# Altium PCB PCB1.PcbDoc
Units mm, origin at the board's own origin, x right, y up, seen from the top; angles counter-clockwise.
Board outline 111.5 x 75 mm, 2 copper layers (Top Layer, Bottom Layer); 100 components, 59 nets, 353 pads, 33 vias.
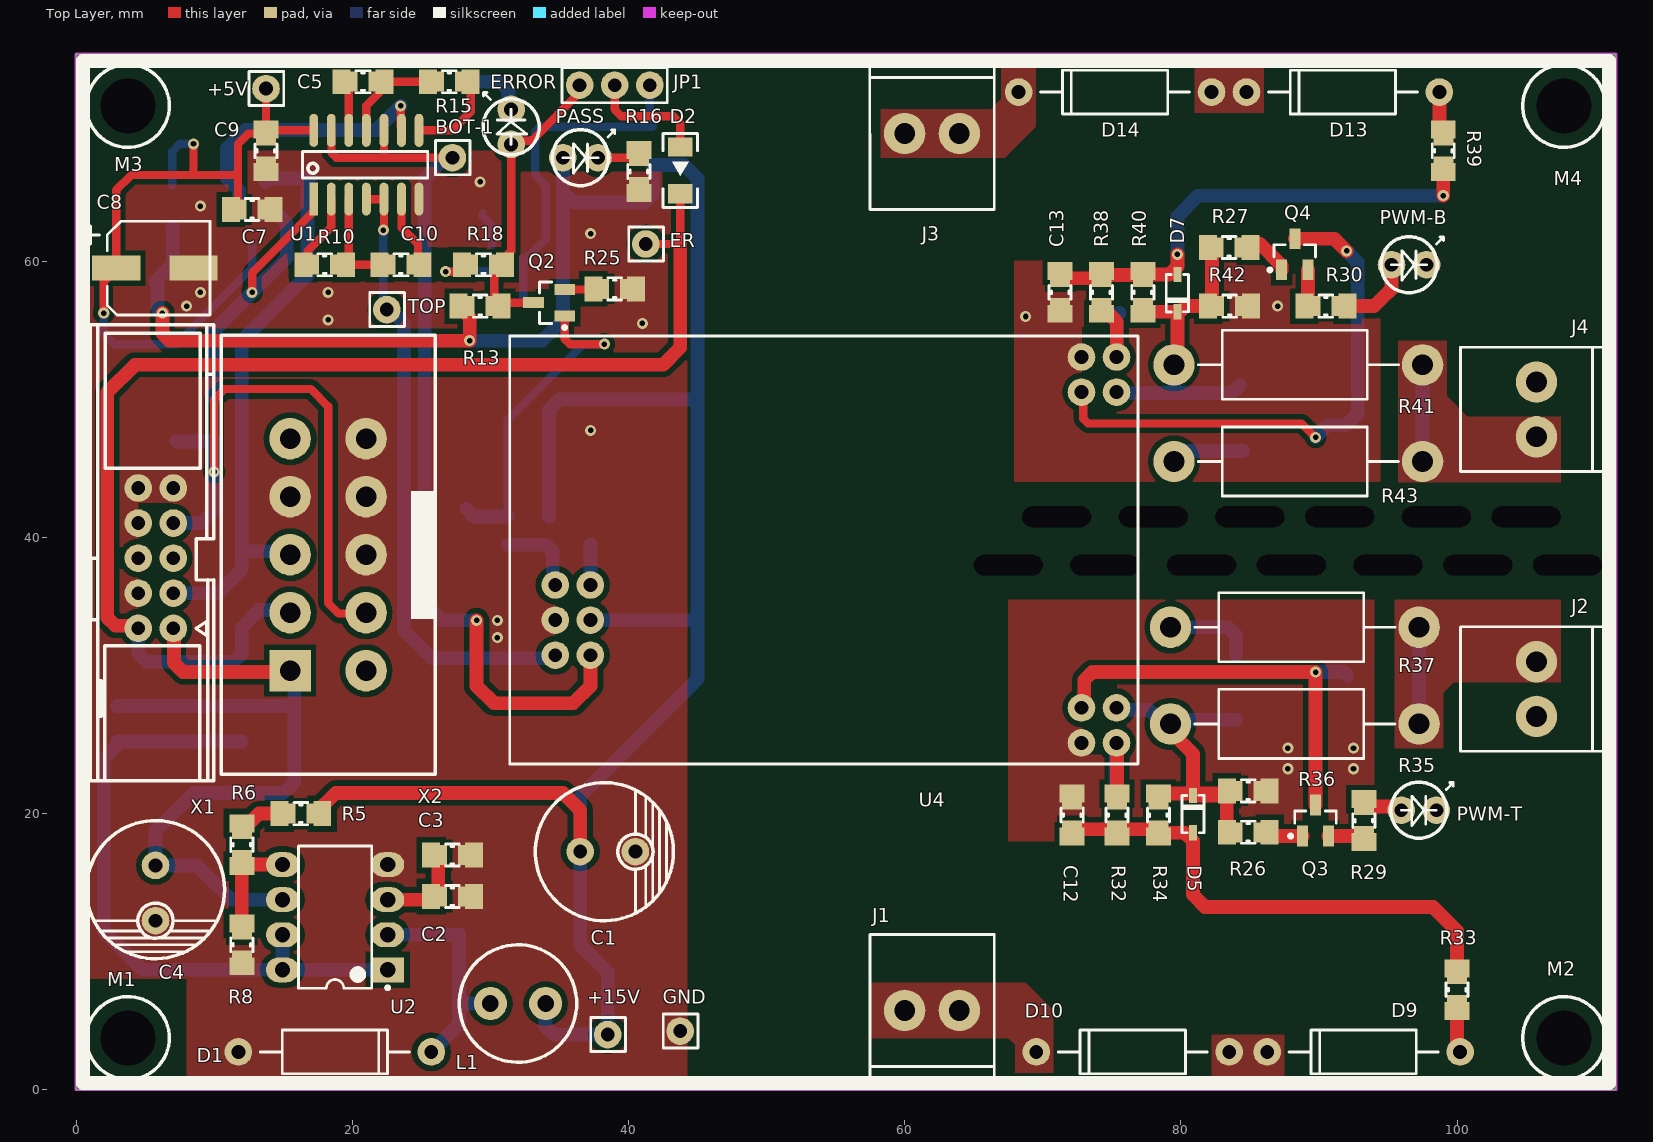
[diagram p0: Top Layer view]
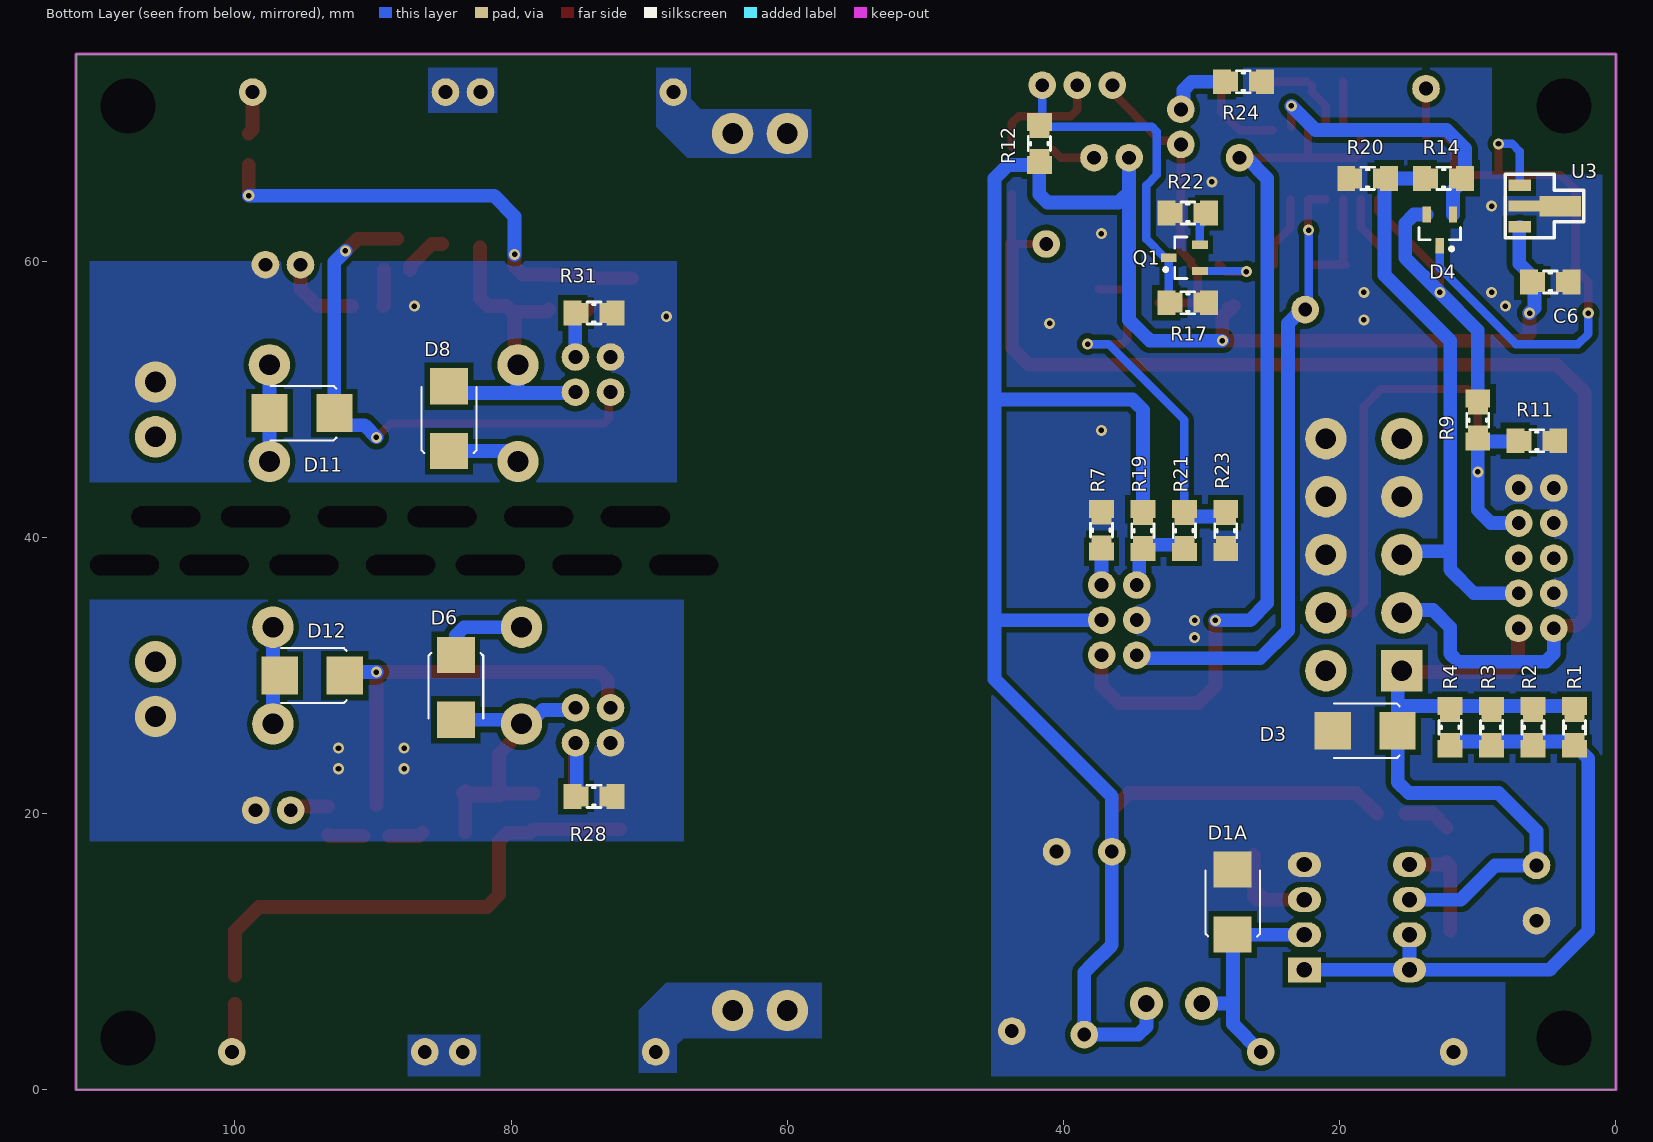
[diagram p1: Bottom Layer view, seen from below]

## Layer stack, top to bottom
Top Solder: solder mask 0.0102, Solder Resist, Dk 3.5
Top Layer: signal copper 0.0356
Dielectric 1: dielectric 0.32, FR-4, Dk 4.8
Bottom Layer: signal copper 0.0356
Bottom Solder: solder mask 0.0102, Solder Resist, Dk 3.5

## Board outline
0,0 111.5,0 111.5,75 0,75

## Design rules (kind name [scope] priority, off if disabled: settings)
Clearance [All] p1: gap=0.4 ignorepadtopadclearanceinfootprint=FALSE
PolygonConnect [All] p1: connectstyle=Direct reliefconductorwidth=0.254 reliefentries=4 polygonreliefangle="90 Angle" airgapwidth=0.254
RoutingVias [All] p1: holewidth=0.711 width=1.27 viastyle="Through Hole" minholewidth=0.711 minwidth=1.27 maxholewidth=0.711 maxwidth=1.27
SolderMaskExpansion [All] p1: expansion=0.102
Width [All] p1: maxlimit=2 minlimit=0.4 preferedwidth=0.4
30 further rules are at their usual default settings.

## Components (designator, comment, footprint, x,y, rotation, side; value= is the part's Value field where it differs from the comment)
+5V "Socket" tp 13.754,72.5 r180 top
+15V "Socket" tp 38.5,4 r180 top
BOT-1 "Socket" tp 27.254,67.5 r180 top
C1 "Cap Pol1" "10 mm Elco" 38.5,17.25 r0 top value=150uF/35V
C2 "Cap" RESC0805-1206 27.25,14 r180 top value=520pF
C3 "Cap" RESC0805-1206 27.25,17 r180 top value=520pF
C4 "Cap Pol1" "10 mm Elco" 5.75,14.25 r270 top value=150uF/35V
C5 "Cap" RESC0805-1206 20.775,73 r180 top value=380pF
C6 "Cap" RESC0805-1206 4.75,58.5 r0 bottom value=108nF
C7 "Cap" RESC0805-1206 12.75,63.75 r180 top value=108nF
C8 "Cap Pol1" "elco cap" 5.7,59.5 r0 top value=10uF/50V
C9 "Cap" RESC0805-1206 13.75,68 r270 top value=105nF
C10 "Cap" RESC0805-1206 23.525,59.75 r180 top value=2.9nF
C12 "Cap" RESC0805-1206 72.125,19.9 r90 top value=380pF
C13 "Cap" RESC0805-1206 71.25,57.75 r90 top value=380pF
D1 "Diode" Diode 25.72,2.75 r180 top value=Open
D1A "Diode" smb 27.75,11.25 r180 bottom value=SK210
D2 "Diode" "1206 diode" 43.75,66.5 r270 top value="Zener Diode"
D3 "Diode" smb 15.801,26 r90 bottom value=S2M
D4 "BAS40-05" SOT23_N 12.75,62.25 r270 bottom
D5 "Diode" "smd diode" 80.875,19.9 r270 top value=BAS316
D6 "Diode" smb 84,31.5 r0 bottom value=SK210
D7 "Diode" "smd diode" 79.75,57.75 r90 top value=BAS316
D8 "Diode" smb 84.5,46.25 r180 bottom value=SK210
D9 "Diode" Diode 86.25,2.75 r0 top value=UF4007
D10 "Diode" Diode 69.53,2.75 r0 top value=UF4007
D11 "Diode" smb 92.801,49 r90 bottom value=SK210
D12 "Diode" smb 92.051,30 r90 bottom value=SK210
D13 "Diode" Diode 84.75,72.25 r0 top value=UF4007
D14 "Diode" Diode 68.25,72.25 r0 top value=UF4007
ER "Socket" tp 41.254,61.25 r180 top
ERROR "LED0" led 31.5,68.46 r90 top value="3mm Led"
GND "Socket" tp 43.75,4.25 r180 top
J1 "Header 2" "2 pin con" 60,5.75 r90 top
J2 "Header 2" "2 pin con" 105.75,27.04 r180 top
J3 "Header 2" "2 pin con" 63.96,69.25 r270 top
J4 "Header 2" "2 pin con" 105.75,47.29 r180 top
JP1 "Header 3" "3 pin con" 39,72.75 r180 top
L1 "Inductor" INDUCTOR 32,6.25 r180 top value=10uH
M1 "Socket" "Mounting Hole" 3.75,3.75 r180 top locked
M2 "Socket" "Mounting Hole" 107.75,3.75 r180 top locked
M3 "Socket" "Mounting Hole" 3.75,71.25 r180 top locked
M4 "Socket" "Mounting Hole" 107.75,71.25 r180 top locked
PASS "LED0" led 35.25,67.5 r0 top value="3mm Led"
PWM-B "LED0" led 95.25,59.75 r0 top value="3mm Led"
PWM-T "LED0" led 95.96,20.25 r0 top value="3mm Led"
Q1 "2N2222A" SOT23_N 31.25,60.25 r0 bottom
Q2 "2N2222" SOT-23_N 34.25,57 r180 top
Q3 "2N2222B" SOT-23_N 89.75,19.5 r90 top
Q4 "2N2222B" SOT-23_N 88.25,60.5 r90 top
R1 "Res3" RESC0805-1206 3,26.25 r270 bottom value=1E
R2 "Res3" RESC0805-1206 6,26.25 r270 bottom value=1E
R3 "Res3" RESC0805-1206 9,26.25 r270 bottom value=1E
R4 "Res3" RESC0805-1206 12,26.25 r270 bottom value=1E
R5 "Res3" RESC0805-1206 16.275,20 r180 top value=10K
R6 "Res3" RESC0805-1206 12,17.75 r90 top value=1K
R7 "Res3" RESC0805-1206 37.25,40.525 r270 bottom value=100K
R8 "Res3" RESC0805-1206 12,10.5 r90 top value=1K
R9 "Res3" RESC0805-1206 10,48.5 r270 bottom value=3.3K
R10 "Res3" RESC0805-1206 18,59.75 r180 top value=5.6K
R11 "Res3" RESC0805-1206 5.725,47 r0 bottom value=4.7K
R12 "Res3" RESC0805-1206 41.75,68.525 r270 bottom value=4.7K
R13 "Res3" RESC0805-1206 29.25,56.75 r180 top value=3.3K
R14 "Res3" RESC0805-1206 12.475,66 r0 bottom value=3.3K
R15 "Res3" RESC0805-1206 27.025,73 r180 top value=5.6K
R16 "Res3" RESC0805-1206 40.75,66.5 r270 top value=4.7K
R17 "Res3" RESC0805-1206 31,57 r0 bottom value=1K
R18 "Res3" RESC0805-1206 29.5,59.75 r180 top value=Open
R19 "Res3" RESC0805-1206 34.25,40.5 r270 bottom value=15K
R20 "Res3" RESC0805-1206 17.975,66 r0 bottom value=4.7K
R21 "Res3" RESC0805-1206 31.25,40.5 r270 bottom value=33K
R22 "Res3" RESC0805-1206 31,63.5 r0 bottom value=0E
R23 "Res3" RESC0805-1206 28.25,40.5 r270 bottom value=3.3K
R24 "Res3" RESC0805-1206 26.975,73 r0 bottom value=10K
R25 "Res3" RESC0805-1206 39,58 r180 top value=0E
R26 "Res3" RESC0805-1206 84.875,18.65 r180 top value=10K
R27 "Res3" RESC0805-1206 83.5,61 r180 top value=10K
R28 "Res3" RESC0805-1206 74,21.25 r0 bottom value=Open
R29 "Res3" RESC0805-1206 93.25,19.5 r90 top value=4.7K
R30 "Res3" RESC0805-1206 90.5,56.75 r180 top value=4.7K
R31 "Res3" RESC0805-1206 74,56.25 r0 bottom value=Open
R32 "Res3" RESC0805-1206 75.375,19.9 r90 top value=15K
R33 "Res3" RESC0805-1206 100,7.25 r90 top value=330E
R34 "Res3" RESC0805-1206 78.375,19.9 r90 top value=18K
R35 "Res3" "2W Res" 79.25,26.5 r0 top value=10E
R36 "Res3" RESC0805-1206 84.875,21.65 r180 top value=22K
R37 "Res3" "2W Res" 79.25,33.5 r0 top value=4.7E
R38 "Res3" RESC0805-1206 74.25,57.75 r90 top value=15K
R39 "Res3" RESC0805-1206 99,68 r90 top value=330E
R40 "Res3" RESC0805-1206 77.25,57.75 r90 top value=18K
R41 "Res3" "2W Res" 79.5,52.5 r0 top value=10E
R42 "Res3" RESC0805-1206 83.525,56.75 r180 top value=22K
R43 "Res3" "2W Res" 79.5,45.5 r0 top value=4.7E
TOP "Socket" tp 22.5,56.5 r180 top
U1 "CD40106" sop14 17.21,64.5 r90 top value=40106
U2 "MC34063AL" DIP-8 18.75,12.5 r180 top
U3 "LM7805" sot-23-3 5.5,64 r270 bottom
U4 "2SC0106T" "14 pin ic" 54.25,38.75 r0 top
X1 "Header 5X2A" "10 pin con" 7.04,33.42 r0 top
X2 "Header 5X2A" "X2 CON" 15.5,30.35 r0 top

## Footprints (in the part's own frame and the unit in brackets; to place one, negate y for a bottom-side part, rotate by r counter-clockwise, add the part's x,y. Pads: shape width x height; smd on the part's side, far side on the other; paste and mask are expansions set on the pad)
"2 pin con" [mm]
  round 3 hole 1.5 unplated: 1(0,0) 2(0,-3.96)
  silkscreen extent -5.5,-6.49 5.51,2.52
"2W Res" [mm]
  round 3 hole 1.5: 1(0,0) 2(18,0)
  silkscreen extent 1.75,-2.5 16.25,2.5
"3 pin con" [mm]
  round 2 hole 1 unplated: 1(-2.54,0) 2(0,0) 3(2.54,0)
  silkscreen extent -3.94,-1.4 3.81,1.27
"10 mm Elco" [mm]
  round 2 hole 1: 1(-2,0) 2(2,0)
  silkscreen extent -5.25,-5 4.75,5
"10 pin con" [mm]
  round 2 hole 1 unplated: 1(0,0) 2(0,2.54) 3(0,5.08) 4(0,7.62) 5(0,10.16) 6(-2.54,10.16) 7(-2.54,7.62) 8(-2.54,5.08) 9(-2.54,2.54) 10(-2.54,0)
  silkscreen extent -6,-11.05 2.92,22
"14 pin ic" [mm]
  round 2 hole 1: 1(-17.01,-2.196) 2(-19.55,-2.196) 3(-17.01,-4.736) 4(-19.55,-4.736) 5(-17.01,-7.276) 6(-19.55,-7.276) 7(18.55,-13.626) 8(21.09,-13.626) 9(18.55,-11.086) 10(21.09,-11.086) 11(18.55,11.774) 12(21.09,11.774) 13(18.55,14.314) 14(21.09,14.314)
  silkscreen extent -22.85,-15.16 22.65,15.84
"1206 diode" [mm]
  rect 1.4x1.8 smd paste+0 mask+0.102: 1(-1.778,0) 2(1.622,0)
  silkscreen extent -2.75,-1.25 2.6,1.25
Diode [mm]
  round 2 hole 1 unplated: 1(0,0) 2(13.97,0)
  silkscreen extent 1.59,-1.59 12.38,1.59
DIP-8 [mm] "DIP; 8 Leads; Row Spacing 7.62 mm; Pitch 2.54 mm"
  rect 2.4x1.8 hole 1.1: 1(-3.81,3.81)
  oval 2.4x1.8 hole 1.1: 2(-3.81,1.27) 3(-3.81,-1.27) 4(-3.81,-3.81) 5(3.81,-3.81) 6(3.81,-1.27) 7(3.81,1.27) 8(3.81,3.81)
  silkscreen extent -3.94,-5.15 2.65,5.23, body extent -3.6,-5.15 3.6,5.15, height 5.08
"elco cap" [mm]
  rect 3.5x1.8 smd: 1(-2.8,0) 2(2.8,0)
  silkscreen extent -5.32,-3.4 4,3.4
INDUCTOR [mm]
  round 2.4 hole 1.2: 1(-2,0) 2(2,0)
  silkscreen extent -4.25,-4.25 4.25,4.25
led [mm]
  round 2 hole 1 unplated: 1(0,0) 2(2.54,0)
  silkscreen extent -0.76,-2.03 3.76,2.03
"Mounting Hole" [mm]
  round 2 hole 4 unplated: 1(0,0)
  silkscreen extent -3,-3 3,3
RESC0805-1206 [mm]
  rect 1.3x1.8 smd: 1(-1.55,0) 2(1.55,0)
  rect 1.25x1.45 smd: 1(-1.025,0) 2(1.025,0)
  silkscreen extent -0.5,-0.8 0.5,0.8, body extent -1.63,-0.82 1.63,0.82, height 0.7
smb [mil]
  rect 107.99x102.99 smd: 1(0,0) 2(0,185)
  silkscreen extent -78,-6 78,182
"smd diode" [mm]
  rect 1.1x0.599 smd: 1(-1.409,0) 2(1.291,0)
  silkscreen extent -1.43,-0.8 1.29,0.8
sop14 [mm]
  rect 2.388x0.635 smd paste+0: 1(0,0)
  oval 2.388x0.635 smd paste+0: 2(0,-1.27) 3(0,-2.54) 4(0,-3.81) 5(0,-5.08) 6(0,-6.35) 7(0,-7.62) 8(4.978,-7.62) 9(4.978,-6.35) 10(4.978,-5.08) 11(4.978,-3.81) 12(4.978,-2.54) 13(4.978,-1.27) 14(4.978,0)
  silkscreen extent 1.54,-8.25 3.44,0.82
SOT23_N [mm] "SOT23, 3-Leads, Body 2.9x1.3mm, Pitch 0.95mm, Lead Span 2.3mm - Reverse Pinning, IPC Medium Density"
  rect 1.15x0.6 smd: 1(1.125,0) 2(-1.125,-0.95) 3(-1.125,0.95)
  silkscreen extent -0.2,-1.5 1.47,1.5, body extent -0.7,-1.5 0.7,1.5, height 1.1
sot-23-3 [mm]
  rect 0.813x1.626 smd paste+0 mask+0.101: 1(-1.499,-1.464) 3(1.499,-1.464)
  rect 0.813x2.388 smd paste+0 mask+0.101: 2(0,-1.083)
  rect 1.5x3 smd: 2(0.025,1.464)
  silkscreen extent -2.29,-2.5 2.29,3.18
SOT-23_N [mm] "SOT23, 3-Leads, Body 2.9x1.3mm, Pitch 0.95mm, Lead Span 2.5mm, IPC Medium Density"
  rect 1.5x0.8 smd: 1(-1.125,0.95) 2(-1.125,-0.95) 3(1.125,0)
  silkscreen extent -1.25,-1.5 0.7,1.92, body extent -0.7,-1.5 0.7,1.5, height 1.1
tp [mm]
  round 2 hole 1 unplated: 1(0.004,0)
  silkscreen extent -1.28,-1.24 1.23,1.23
"X2 CON" [mm]
  rect 3x3 hole 1.5: 1(0,0)
  round 3 hole 1.5: 2(0,4.2) 3(0,8.4) 4(0,12.6) 5(0,16.8) 6(5.5,16.8) 7(5.5,12.6) 8(5.5,8.4) 9(5.5,4.2) 10(5.5,0)
  silkscreen extent -5,-7.5 10.5,24.3

## Part data
C1 C4 C8: "Polarized Capacitor (Radial)", LatestRevisionDate=17-Jul-2002, LatestRevisionNote="Re-released for DXP Platform.", PackageDescription="Polarized Capacitor (Radial); 2 Leads", PackageReference=RB7.6-15, Published=8-Jun-2000, Publisher="Altium Limited"
C2 C3 C5 C6 C7 C9 C10 C12 C13: "Capacitor", LatestRevisionDate=17-Jul-2002, LatestRevisionNote="Re-released for DXP Platform.", PackageDescription="Radial Cap, Thru-Hole; 2 Leads; 0.3 in Pin Spacing", PackageReference=RAD-0.3, Published=8-Jun-2000, Publisher="Altium Limited"
D2: "Default Diode", Code_JEDEC=DO-214-AB, LatestRevisionDate=17-Jul-2002, LatestRevisionNote="Re-released for DXP Platform.", PackageDescription="DO-214-AB/SMC; 2 C-Bend Leads; Body 7.9 x 5.9 mm, inc. leads (LxW)", PackageReference=SMC, PackageVersion=Sep-1996, Published=8-Jun-2000, Publisher="Altium Limited"
ERROR PASS PWM-B PWM-T: "Typical INFRARED GaAs LED", LatestRevisionDate=08-Jul-2005, LatestRevisionNote="Mech Layer 1 removed.", PackageDescription="LED; 2 Leads", PackageReference=LED-0, Published=8-Jun-2000, Publisher="Altium Limited"
J1 J2 J3 J4: "Header, 2-Pin", LatestRevisionDate=17-Jul-2002, LatestRevisionNote="Re-released for DXP Platform.", Publisher="Altium Limited"
JP1: "Header, 3-Pin", LatestRevisionDate=17-Jul-2002, LatestRevisionNote="Re-released for DXP Platform.", Publisher="Altium Limited"
R1 R2 R3 R4 R5 R6 R7 R8 R9 R10 R11 R12 R13 R14 R15 R16 R17 R18 R19 R20 R21 R22 R23 R24 R25 R26 R27 R28 R29 R30 R31 R32 R33 R34 R35 R36 R37 R38 R39 R40 R41 R42 R43: "Resistor", LatestRevisionDate=29-May-2009, LatestRevisionNote="IPC-7351 Footprint Added.", PackageDescription="Chip Resistor", PackageReference=J1-0603, Published=8-Jun-2000, Publisher="Altium Limited"
X1 X2: "Header, 5-Pin, Dual row", LatestRevisionDate=17-Jul-2002, LatestRevisionNote="Re-released for DXP Platform.", Publisher="Altium Limited"
+5V +15V BOT-1 ER GND M1 M2 M3 M4 TOP: LatestRevisionDate=17-Jul-2002, LatestRevisionNote="Re-released for DXP Platform.", Publisher="Altium Limited"
L1: Code_IEC=1005, Code_JEITA=0402, LatestRevisionDate=29-May-2009, LatestRevisionNote="IPC-7351 Footprint Added.", PackageDescription="Chip Inductor", PackageReference=0402-A, Published=8-Jun-2000, Publisher="Altium Limited"

## Free pads (board coordinates)
  round 0 hole 1.5 slot 5 at 0 deg unplated: 2(67.5,38) 3(71,41.5) 4(74.5,38) 5(78,41.5) 6(81.5,38) 6(95,38) 7(85,41.5) 7(98.5,41.5) 8(88,38) 8(101.5,38) 8(108,38) 9(91.5,41.5) 9(105,41.5)

## Via types
v1: diameter 0.8, hole 0.4, Top Layer to Bottom Layer, 33 vias

## Nets (pads, with @x,y where several pads share a name; then routed paths per layer and width w, separated by ;. In a path a pad name is that pad's centre, name@x,y a point inside that pad or via, vN(x,y) a via of type N, cw(c..) or ccw(c..) an arc to the next point about the centre after c; other vN are vias at no path point)
+5V: +5V.1 C7.2 C8.1 C9.1 D4.1 U1.14 U3.1 | length 55.6
  Top Layer w0.6: v1(2,56.25) 2,58.5 C8.1@3,59.5 ; C8.1 2.9,65.149 4.001,66.25 11.587,66.25 11.725,66.112 ; 8.5,66.25 v1(8.5,68.5) ; C7.2@11.725,63.75 11.725,66.112 ; C9.1@13.75,69.025 C9.1@13.75,69.25 ; +5V.1 C9.1@13.75,69.55 ; U1.14 13.822,69.478 C9.1@13.75,69.55 ; 11.725,66.112 11.725,68.475 12.5,69.25 C9.1@13.75,69.25 ; C9.1@13.75,69.25 C9.1@13.75,69.55
  Bottom Layer w0.6: v1(2,56.25) 2,54.75 2.75,54 7.25,54 12.75,59.5 D4.1 ; U3.1 6.964,67.964 7.5,68.5 v1(8.5,68.5)
+15V: +15V.1 C1.1 C6.2 L1.1 PASS.1 R5.1 R12.2 R13.2 R19.1 U3.3 U4.3 | length 195.4
  Top Layer w0.6: R13.2@28.125,56.65 R13.2@28.225,56.75
  Top Layer w1: v1(6.25,56.25) 6.25,54.75 6.75,54.25 v1(28.5,54.25) 28.5,55.95 R13.2@27.7,56.75 ; R5.1@17.3,20 18.8,21.5 35.25,21.5 36.5,20.25 C1.1
  Bottom Layer w1: v1(6.25,56.25) 5.9,56.6 5.9,58.375 5.775,58.5 5.775,58.6 7,59.825 7,60.75 7,62.465 U3.3 ; v1(28.5,54.25) 33.75,54.25 34.25,54.75 35.25,55.75 35.25,65.75 ; L1.1 34,4.586 34.586,4 +15V.1 38.496,8.504 38,9 36.5,10.5 C1.1@36.5,17 ; R19.1@34.25,41.525 34.25,49.25 34.75,49.75 35,50 45,50 ; PASS.1@35.25,67.25 35.25,65 35.75,64.5 36,64.25 40.75,64.25 41.164,64.25 41.75,64.836 41.75,66.975 44.025,66.975 44.5,66.5 45,66 45,64.75 45,39.25 ; C1.1 36.5,21.25 40.5,25.25 ; 37.25,22 45,29.75 45,41.25 ; U4.3@37.25,33.96 37.29,34 45,34
ERROR: D2.2 ER.1 X1.10 X2.2 | length 91.2
  Top Layer w0.6: ER.1 43.75,61.25 D2.2
  Top Layer w1: X1.10 4.309,33.611 2.836,33.611 2.25,34.197 2.25,50.5 4.25,52.5 42.5,52.5 43.75,53.75 43.75,61.25
  Bottom Layer w1: X1.10 4.5,31.586 5.086,31 11.414,31 12,31.586 12,33.5 13.25,34.75 15.3,34.75 X2.2
ERROR1: ERROR.1 JP1.3 Q2.3 R13.1 R18.1 | length 21.4
  Top Layer w0.6: R13.1@30.275,56.75 30.275,59.275 R18.1@30.75,59.75 ; R13.1@30.75,57 Q2.3 ; R18.1@30.75,60 31.5,60.75 ERROR.1 31.768,68.728 32.978,68.728 33.25,69 36.46,72.21 JP1.3
ERROR2: JP1.1 Q1.1 R12.1 R17.2 | length 25
  Bottom Layer w0.6: R17.2@32.55,57 32.375,57.175 Q1.1 32.65,60.25 34,61.6 34,65.5 33.25,66.25 33.25,69.399 33.601,69.75 R12.1@41.75,69.75 ; JP1.1 41.54,70.285 R12.1@41.75,70.075
G1: D5.1 D6.2 R26.2 R34.2 R35.1 R36.2 U4.10 | length 25.9
  Top Layer w1: R34.2@78.375,21.45 83.45,21.45 83.5,21.5 83.31,21.31 D5.1 80.875,24.334 80.5,24.709 79.25,25.959 R35.1 ; R26.2@83.325,18.65 R36.2@83.325,21.65
  Bottom Layer w1: U4.10@75.35,27.61 75.46,27.5 77.25,27.5 77.709,27.5 78.709,26.5 R35.1 79.551,26.801 D6.2
G2: D7.1 D8.2 R27.2 R40.1 R41.1 R42.2 U4.12 | length 24.1
  Top Layer w1: R40.1@77.25,56.5 77.409,56.34 D7.1 ; R41.1 79.75,52.75 79.75,56.164 80.336,56.75 81.664,56.75 82.132,57.218 82.25,57.336 R27.2@82.25,61
  Bottom Layer w1: U4.12@75.35,50.47 83.72,50.47 D8.2@84.25,51 ; R41.1 79.535,52.465 79.535,50.47
GND: C1.2 C2.1 C3.1 C4.2 C6.1 C7.1 C8.2 C9.2 D1.2 D1A.2 D3.2 GND.1 R7.1 R8.1 R11.1 R16.2 R17.1 R20.2 R22.2 R23.2 R24.1 R25.1 U1.7 U2.4 U3.2 U4.4 X1.5 X1.6 X1.7 X1.9 X2.4 X2.6 X2.7 X2.8 | length 0.4
  Top Layer w1: U4.4@34.67,34 U4.4@34.71,33.96
  Bottom Layer w1: X2.4 X2.4@15.7,42.75 ; U4.4@34.67,34 U4.4@34.71,33.96
  other v1: 30.5,32.75 30.5,34 37.25,47.75 41,55.5 18.25,55.75 8,56.75 9,57.75 18.25,57.75 37.25,62 9,64 29.25,65.75
"I/P A": D4.2 R9.1 U1.1 | length 25.3
  Top Layer w0.6: v1(12.75,57.75) 12.75,59 12.75,59.164 17.21,63.624 U1.1
  Bottom Layer w1: R9.1@10,50.05 10,52.75 10,54.25 10,55 v1(12.75,57.75) 15.25,60.25 15.25,61.25 15.25,62.75 14.75,63.25 14.625,63.375 D4.2
"I/P D": D4.3 R14.1 U1.9 | length 22.5
  Top Layer w0.6: U1.9@23.5,69.75 v1(23.5,71.25)
  Bottom Layer w1: D4.3 11.8,65.125 10.925,66 10.925,68.175 11.25,68.5 12.25,69.5 14.5,69.5 20.5,69.5 ; 18.5,69.5 21.75,69.5 v1(23.5,71.25)
NetC2_2: C2.2 C3.2 U2.3 | length 7
  Top Layer w1: U2.3 25.995,13.77 C2.2@26.225,14 ; C2.2@25.7,14 26.225,14.525 C3.2@26.225,17
NetC5_1: C5.1 R15.2 U1.11 | length 6.8
  Top Layer w0.6: U1.11 21.02,71.27 21.5,71.75 22,72.25 C5.1@22,72.75 ; C5.1@22.325,73 R15.2@25.475,73
NetC5_2: C5.2 U1.12 | length 3.5
  Top Layer w0.6: U1.12 C5.2@19.75,73
NetC10_1: C10.1 U1.6 | length 5.2
  Top Layer w0.6: U1.6 23.56,62.44 23.75,62.25 24.75,61.25 C10.1@24.75,59.75
NetC10_2: C10.2 R10.1 U1.3 | length 7.2
  Top Layer w0.6: R10.1@19.55,59.75 C10.2@21.975,59.75 ; R10.1@19.75,59.75 U1.3
NetC12_1: C12.1 D5.2 R32.1 R33.2 R34.1 | length 36.4
  Top Layer w1: C12.1@72.125,18.875 75.375,18.875 78.375,18.875 78.641,18.61 80.289,18.61 80.875,18.024 80.875,14.125 81.75,13.25 98.25,13.25 98.5,13 100,11.5 100,8.8 R33.2@100,8.275
NetC13_2: C13.2 D7.2 R38.2 R39.1 R40.2 | length 42.6
  Top Layer w1: C13.2@71.25,58.775 74.025,58.775 74.25,59 77.25,59 77.291,59.04 79.164,59.04 79.457,59.333 79.75,59.626 v1(79.75,60.5) ; v1(99,64.75) R39.1@99,66.975
  Bottom Layer w1: v1(79.75,60.5) 79.75,62 79.75,63.25 81.25,64.75 95,64.75 ; 95,64.75 v1(99,64.75) ; 95,64.75 v1(99,64.75) ; 95,64.75 v1(99,64.75)
NetD1_1: D1.1 D1A.1 L1.2 U2.2 | length 16.8
  Bottom Layer w1: U2.2 D1A.1@27.73,11.23 ; D1.1 27.73,4.76 D1A.1@27.73,11.23 ; 27.75,6.25 L1.2 ; D1A.1 D1A.1@27.73,11.23
NetD2_1: D2.1 JP1.2 | length 8.6
  Top Layer w0.6: JP1.2 39,71 39.5,70.5 41.328,70.5 43.25,70.5 43.75,70 D2.1
NetD6_1: D6.1 R37.1 | length 6.4
  Bottom Layer w1: R37.1 83.414,33.5 84,32.914 D6.1
NetD8_1: D8.1 R43.1 | length 5.3
  Bottom Layer w1: R43.1 80.25,46.25 D8.1
NetD9_1: D9.1 D10.2
NetD9_2: D9.2 R33.1 | length 3.7
  Top Layer w1: D9.2@100,2.5 R33.1@100,6.225
NetD10_1: D10.1 J1.1 J1.2
NetD11_2: D11.2 J4.1 R41.2 R43.2 | length 7
  Bottom Layer w1: R43.2 D11.2 R41.2
NetD12_2: D12.2 J2.2 R35.2 R37.2 | length 7
  Bottom Layer w1: R35.2 R37.2
NetD13_1: D13.1 D14.2 | length 0
NetD13_2: D13.2 R39.2 | length 3.1
  Top Layer w1: D13.2 98.72,69.53 R39.2@99,69.25
NetD14_1: D14.1 J3.1 J3.2
NetERROR_2: ERROR.2 R24.2 | length 4.5
  Bottom Layer w1: R24.2@28.525,73 30.723,73 31.309,72.414 31.309,71.191 ERROR.2
NetPASS_2: PASS.2 R16.1 | length 3.2
  Top Layer w0.6: PASS.2 40.2,67.5 R16.1@40.75,68.05
NetPWM-B_1: PWM-B.1 R30.1 | length 6
  Top Layer w1: R30.1@91.525,56.75 94,56.75 94.5,57.25 95.25,58 PWM-B.1
NetPWM-T_1: PWM-T.1 R29.2 | length 2.8
  Top Layer w1: R29.2@93.25,20.525 95.685,20.525 PWM-T.1
NetQ1_2: Q1.2 R22.1 | length 2.6
  Bottom Layer w0.6: R22.1@29.45,63.5 29.45,63.25 30.125,62.575 Q1.2
NetQ1_3: Q1.3 R18.2 | length 5.6
  Top Layer w0.6: v1(26.75,59.25) 28.25,59.25 R18.2@28.75,59.75
  Bottom Layer w0.6: v1(26.75,59.25) 26.8,59.3 Q1.3
NetQ2_1: Q2.1 R21.1 R23.1 | length 23.8
  Top Layer w0.6: Q2.1 35.375,54.375 ; 35.5,54.25 35.375,54.375 ; v1(38.25,54) 35.75,54 35.375,54.375
  Bottom Layer w0.6: R21.1@31.25,42.05 31.25,48.5 36.25,53.5 36.75,54 v1(38.25,54)
  Bottom Layer w1: R23.1@28.25,42.05 28.775,41.525 R21.1@31.25,41.525
NetQ2_2: Q2.2 R25.2 | length 2.1
  Top Layer w0.6: Q2.2 37.4,57.95 R25.2@37.45,58
NetQ3_1: Q3.1 R26.1 | length 2.5
  Top Layer w1: R26.1@86.425,18.65 86.7,18.375 Q3.1
NetQ3_2: Q3.2 R29.1 | length 2.6
  Top Layer w1: Q3.2 93.15,18.375 R29.1@93.25,18.475
NetQ4_1: Q4.1 R27.1 | length 3.3
  Top Layer w1: R27.1@85,61.25 85.75,61.25 87.3,59.7 Q4.1
NetQ4_2: Q4.2 R30.2 | length 2.6
  Top Layer w1: Q4.2 89.2,56.8 R30.2@89.25,56.75
NetR1_2: R1.2 R2.2 R3.2 R4.2 U2.1 U2.7 U2.8 | length 47.2
  Bottom Layer w1: R1.2@3,25 2,24 2,15 2,11.5 4.5,9 4.81,8.69 U2.8 ; R1.2@3,25.225 6,25.225 R4.2@12,25.225 ; U2.7 U2.8 ; U2.1 U2.8
NetR5_2: R5.2 R6.2 | length 3.4
  Top Layer w1: R6.2@12.25,19 13.25,20 R5.2@15.25,20
NetR6_1: R6.1 R8.2 U2.5 | length 7.4
  Top Layer w1: R8.2@12,11.525 R6.1@12,16.2 ; R6.1@12.25,16.5 12.44,16.31 U2.5
NetR7_2: R7.2 U4.1 | length 3
  Bottom Layer w1: U4.1@37.25,36.5 R7.2@37.25,39.5
NetR10_2: R10.2 U1.2 | length 5.5
  Top Layer w0.6: R10.2@16.75,59.75 16.75,60.75 18.48,62.48 18.48,62.52 U1.2
NetR15_1: R15.1 U1.8 | length 6.5
  Top Layer w0.6: U1.8 27.228,69.478 28.25,70.5 28.575,70.825 R15.1@28.575,73
"PWM INA": R9.2 R11.2 X1.4 X2.9 | length 44
  Top Layer w0.6: v1(10,44.75) 10,50 10.25,50.25 10.75,50.75 14.75,50.75 ; 13.5,50.75 14,50.75 17,50.75 18.25,49.5 18.25,39.25 18.25,35.25 19,34.5 20.95,34.5 X2.9
  Bottom Layer w1: X1.4 9.04,41.04 9.5,41.5 10,42 10,46.95 7.325,46.95 R11.2@7.275,47
"PWM INB": R14.2 R20.1 X1.2 X2.3 | length 42.9
  Bottom Layer w1: X1.2 10.29,35.96 12,37.67 12,39 ; R14.2@13.75,65.75 14,66 14.025,66 16.425,66 R20.1@16.75,66 ; X2.3 15.25,39 12,39 ; R20.1@16.95,66 R20.1@16.75,66 ; 12,39 12,54.25 16.75,59 R20.1@16.75,66
PWMA: BOT-1.1 U1.10 U1.13 U4.5 | length 66.8
  Top Layer w0.6: U1.13 18.487,69.471 18.487,67.851 18.838,67.5 22.5,67.5 ; U1.10 22.29,67.71 22.5,67.5 ; BOT-1.1@27,67.25 BOT-1.1 22.5,67.5
  Top Layer w1: v1(29,34) 29,29.25 30.25,28 36,28 37.25,29.25 U4.5@37.25,31.42
  Bottom Layer w1: BOT-1.1 26.75,67.5 25.25,66 25.25,35.25 26.5,34 v1(29,34)
PWMB: TOP.1 U1.4 U1.5 U4.6 | length 45.4
  Top Layer w0.6: U1.4 U1.5 22.29,62.29 v1(22.25,62.25)
  Bottom Layer w0.6: v1(22.25,62.25) 22.25,56.746 TOP.1
  Bottom Layer w1: TOP.1@22.25,56.5 TOP.1 22.75,56.5 23.75,55.5 23.75,33.25 25.75,31.25 34.54,31.25 U4.6@34.71,31.42
SO: R19.2 R21.2 U4.2 | length 6
  Bottom Layer w1: R21.2@31.25,39.475 34.025,39.475 34.25,39.25 34.519,38.981 34.519,36.691 U4.2@34.71,36.5
VCC: C4.1 D3.1 R1.1 R2.1 R3.1 R4.1 U2.6 X1.1 X2.1 | length 56.8
  Top Layer w1: X1.1 7.08,33.38 7.08,30.92 7.5,30.5 7.75,30.25 X2.1@15.75,30.25
  Bottom Layer w1: R1.1@3,27.8 15.576,27.8 15.801,28.025 ; U2.6 11.27,13.77 11.23,13.77 8.75,16.25 C4.1 5.75,18.75 6.25,19.25 8.5,21.5 15,21.5 15.801,22.301 D3.1 15.801,30.049 X2.1
VCE1: R28.2 R32.2 U4.8 | length 7.2
  Top Layer w1: U4.8@75.35,25.07 75.375,25.045 R32.2@75.375,21.45
  Bottom Layer w1: R28.2@75.25,21.5 75.25,24.97 U4.8@75.35,25.07
VCE2: R31.2 R38.1 U4.14 | length 7.5
  Top Layer w1: R38.1@74.25,56.725 75.35,55.625 U4.14@75.35,53.01
  Bottom Layer w1: U4.14@75.35,53.01 75.35,56.05 R31.2@75.55,56.25
VE1: C12.2 J2.1 PWM-T.2 R28.1 R36.1 U4.7
  other v1: 87.75,23.25 92.5,23.25 87.75,24.75 92.5,24.75
VE2: C13.1 J4.2 PWM-B.2 R31.1 R42.1 U4.13
  other v1: 68.75,56 87,56.75
VISO1: D12.1 Q3.3 U4.9 | length 31.2
  Top Layer w1: U4.9@72.81,27.61 73,27.8 73,29.664 73.586,30.25 v1(89.75,30.25) Q3.3
  Bottom Layer w1: v1(89.75,30.25) 91.801,30.25 D12.1
VISO2: D11.1 Q4.3 U4.11 | length 39.3
  Top Layer w0.6: U4.11@72.81,50.47 72.93,50.35 72.93,48.601 73.281,48.25 88.75,48.25 v1(89.75,47.25)
  Top Layer w1: Q4.3 91.125,61.625 v1(92,60.75)
  Bottom Layer w1: v1(89.75,47.25) 90.629,48.129 91.993,48.129 92.801,48.937 D11.1 92.801,59.949 v1(92,60.75)
pads on no net: M1.1 M2.1 M3.1 M4.1 X1.3 X1.8 X2.5 X2.10

## Polygon pours and split planes (outlines as drawn)
GND on Top Layer "Top Layer-NewNet12" (solid, remove dead copper, pour order 4): 44.25,68 1,68 1,1 44.25,1
VE1 on Top Layer "Top Layer-NewNet12" (solid, remove dead copper, pour order 0): 94,35.5 67.5,35.5 67.5,18 94,18
VE2 on Top Layer "Top Layer-NewNet12" (solid, remove dead copper, pour order 2): 94.438,60.032 67.939,60.032 67.939,44.032 94.438,44.032
NetD11_2 on Top Layer "Top Layer-NewNet27" (solid, remove dead copper, pour order 32): 95.75,54.25 95.75,44 107.5,44 107.5,48.75 100.75,48.75 99.25,50.25 99.25,54.25
NetD14_1 on Top Layer "Top Layer-NewNet21" (solid, remove dead copper, pour order 24): 69.5,74 69.5,69.75 67.25,67.5 58.25,67.5 58.25,71 66.25,71 67,71.75 67,74
NetD12_2 on Top Layer "Top Layer-NewNet26" (solid, remove dead copper, pour order 30): 95.5,24.75 99,24.75 99,28.75 99.75,29.5 107.5,29.5 107.5,35.5 95.5,35.5
NetD10_1 on Top Layer "Top Layer-NewNet36" (solid, remove dead copper, pour order 12): 70.75,1.25 68,1.25 68,3.25 67.5,3.75 57.5,3.75 57.5,7.75 68.75,7.75 70.75,5.75
NetD9_1 on Top Layer "Top Layer-NewNet29" (solid, remove dead copper, pour order 16): 87.5,1 82.25,1 82.25,4 87.5,4
NetD13_1 on Top Layer "Top Layer-NewNet22" (solid, remove dead copper, pour order 22): 86,74 86,70.75 81,70.75 81,74
no net on Top Layer "Top Layer-No Net" (solid, remove dead copper, pour order 14): 24,1.25
GND on Bottom Layer "Top Layer-NewNet2" (solid, remove dead copper, pour order 10): 45.25,1 1,1 1,74 45.25,74
VE1 on Bottom Layer "Top Layer-NewNet12 1" (solid, remove dead copper, pour order 8): 110.5,18 67.5,18 67.5,35.5 110.5,35.5
VE2 on Bottom Layer "Top Layer-NewNet9" (solid, remove dead copper, pour order 6): 110.5,44 68,44 68,60 110.5,60
NetD14_1 on Bottom Layer "Bottom Layer-NewNet21" (solid, remove dead copper, pour order 18): 69.5,74 69.5,69.75 67.25,67.5 58.25,67.5 58.25,71 66.25,71 67,71.75 67,74
NetD10_1 on Bottom Layer "Bottom Layer-NewNet36" (solid, remove dead copper, pour order 28): 70.75,1.25 68,1.25 68,3.25 67.5,3.75 57.5,3.75 57.5,7.75 68.75,7.75 70.75,5.75
NetD9_1 on Bottom Layer "Bottom Layer-NewNet29" (solid, remove dead copper, pour order 26): 87.5,1 82.25,1 82.25,4 87.5,4
NetD13_1 on Bottom Layer "Bottom Layer-NewNet22" (solid, remove dead copper, pour order 20): 86,74 86,70.75 81,70.75 81,74

## Keep-outs
Keep-Out Layer:
  the board outline again, w0.2

## Other copper
Top Layer:
  pour cut-out: 42.45,66.489 32.261,66.489 32.25,66.5 32.25,68.5 42.5,68.5
  pour cut-out: 4.5,42.5 4.5,33.42 7.04,33.42 7.04,42.5
  pour cut-out: 15.4,58.45 15.45,58.5 29.75,58.5 29.75,61 15.25,61
  pour cut-out: 35.5,56.25 35.5,58 33.25,58 33.25,56.379 33.171,56.3
  pour cut-out: 34.71,36.5 34.71,31.42 37.25,31.42 37.25,36.5
  pour cut-out: 45,63.778 42.45,63.778 42.45,69.2 42.5,69.25 45,69.25
  pour cut-out: 72.81,55.25 72.81,48.75 75.35,48.75 75.35,55.25
  pour cut-out: 72.81,29.5 72.81,24.25 75.375,24.25 75.375,29.5
  pour cut-out: 87.3,59.375 87.3,61.7 87.25,61.75 89.5,61.75 89.5,59.25 89.375,59.375
  pour cut-out: 88.8,18.375 88.8,20.317 88.873,20.39 90.64,20.39 90.7,20.45 90.7,18.375
Bottom Layer:
  pour cut-out: 7,42 4.5,42 4.5,32.5 7,32.5
  pour cut-out: 29.5,60.75 31.75,60.75 31.75,59.631 29.619,59.631 29.5,59.75
  pour cut-out: 17,39 17,35 14,35 14,38.75 14.25,39
  pour cut-out: 37.25,36 34.71,36 34.71,31.75 37.25,31.75
  pour cut-out: 13.5,63.5 13.5,61.5 12,61.5 12,63.5
  pour cut-out: 75.25,53.75 72.75,53.75 72.75,50.47 75.35,50.47 75.25,50.57
  pour cut-out: 75.405,27.555 72.865,27.555 72.81,27.61 72.75,27.55 72.75,25 75.28,25 75.35,25.07 75.35,27.61
  pour cut-out: 7.25,42
  pour cut-out: 7.5,7.25
  pour cut-out: 29.5,60.75
  pour cut-out: 29.75,61
  pour cut-out: 32.25,61.5
Multi-Layer:
  pour cut-out: 0,74 9,74 9,66.25 0,66.25
  pour cut-out: 0,8.048 8,8.048 8,1 0,1

## Silkscreen, mask and mechanical layers (free items; w line width, h text height)
Top Overlay:
  lines w1: 0.5,0.5 111,0.5 111,74.5 0.5,74.5 0.5,0.5